# Altium PCB top pcd.PcbDoc
Units mil, origin at the board's own origin, x right, y up, seen from the top; angles counter-clockwise.
Board outline 3015 x 3545 mil, 2 copper layers (Top Layer, Bottom Layer); 18 components, 70 nets, 74 pads, 0 vias.
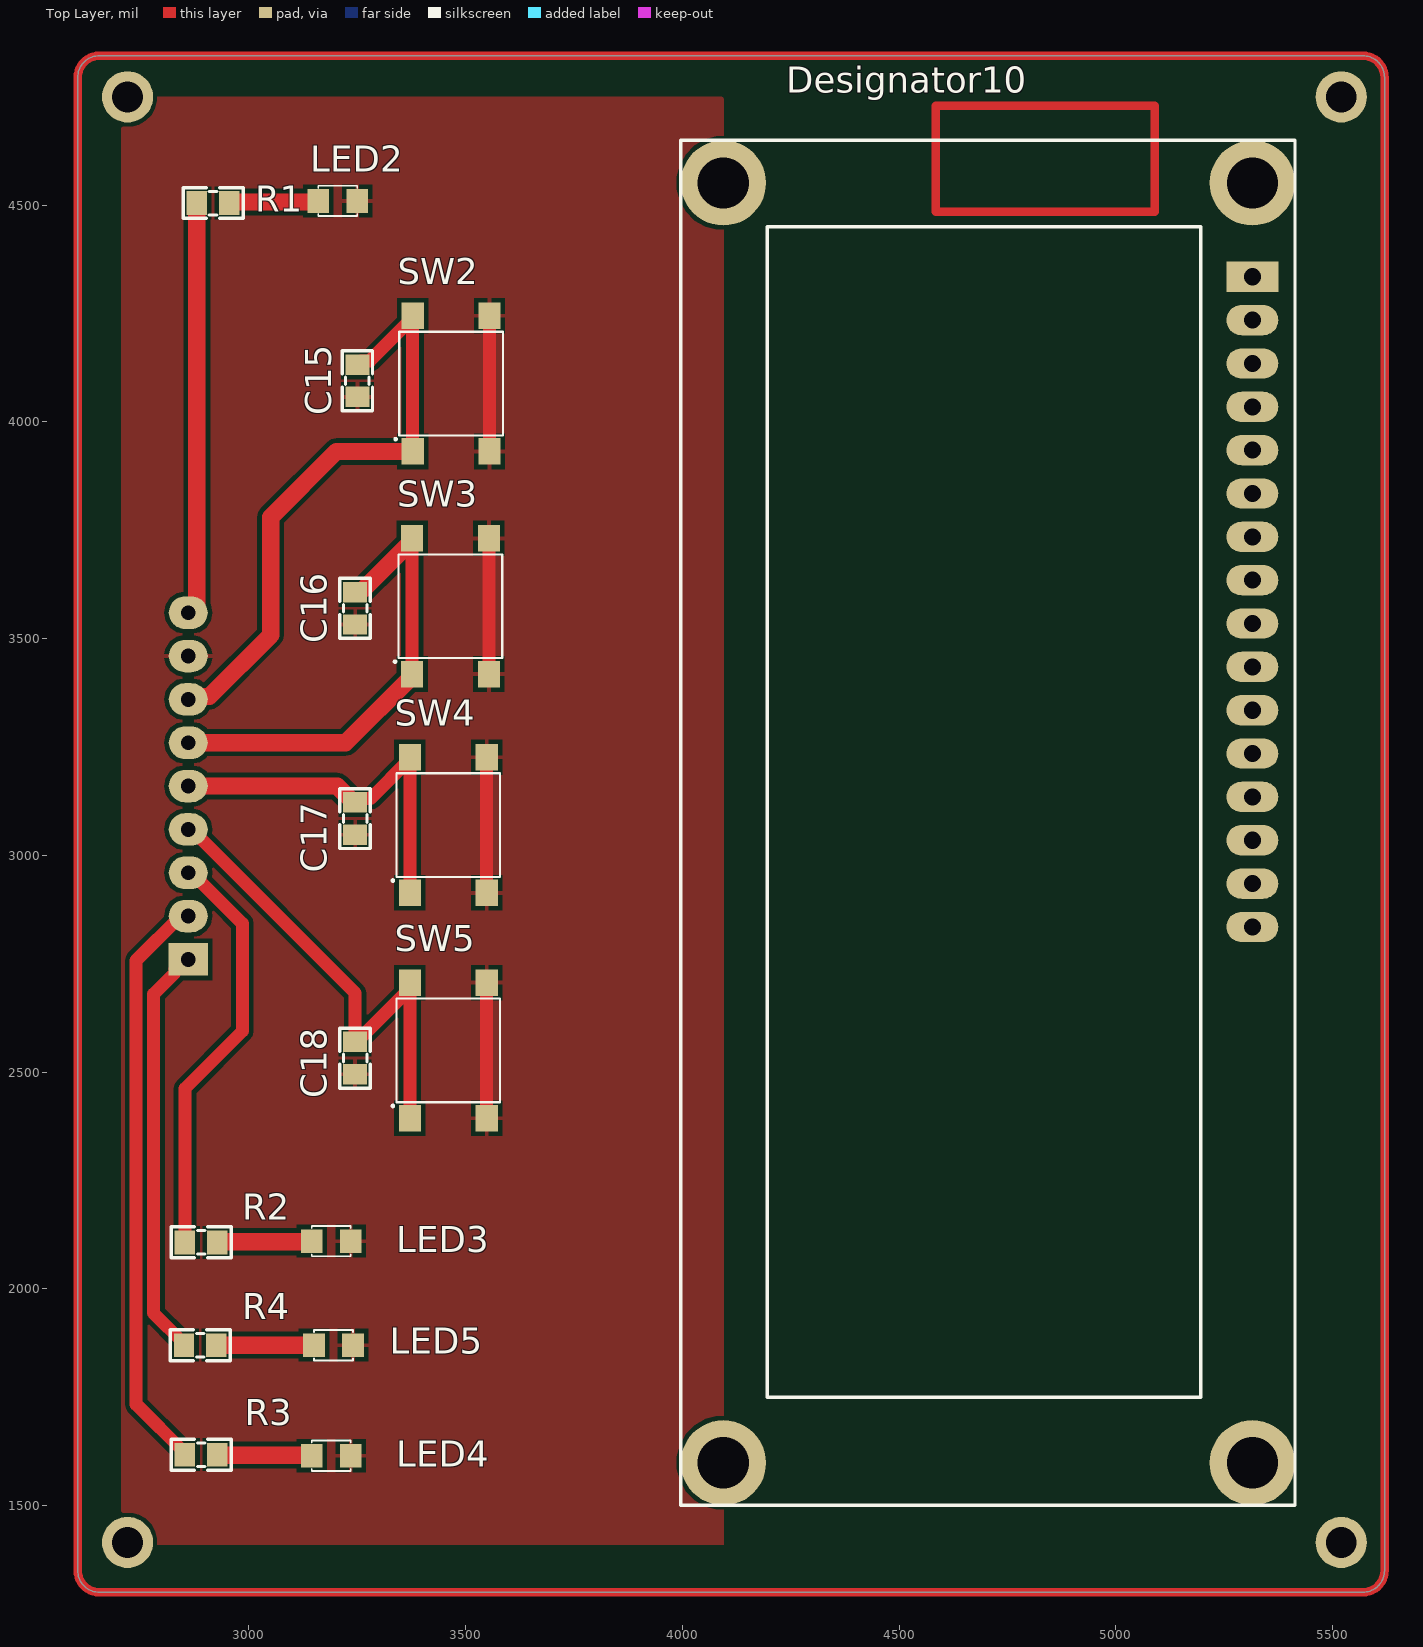
[diagram p0: Top Layer view]
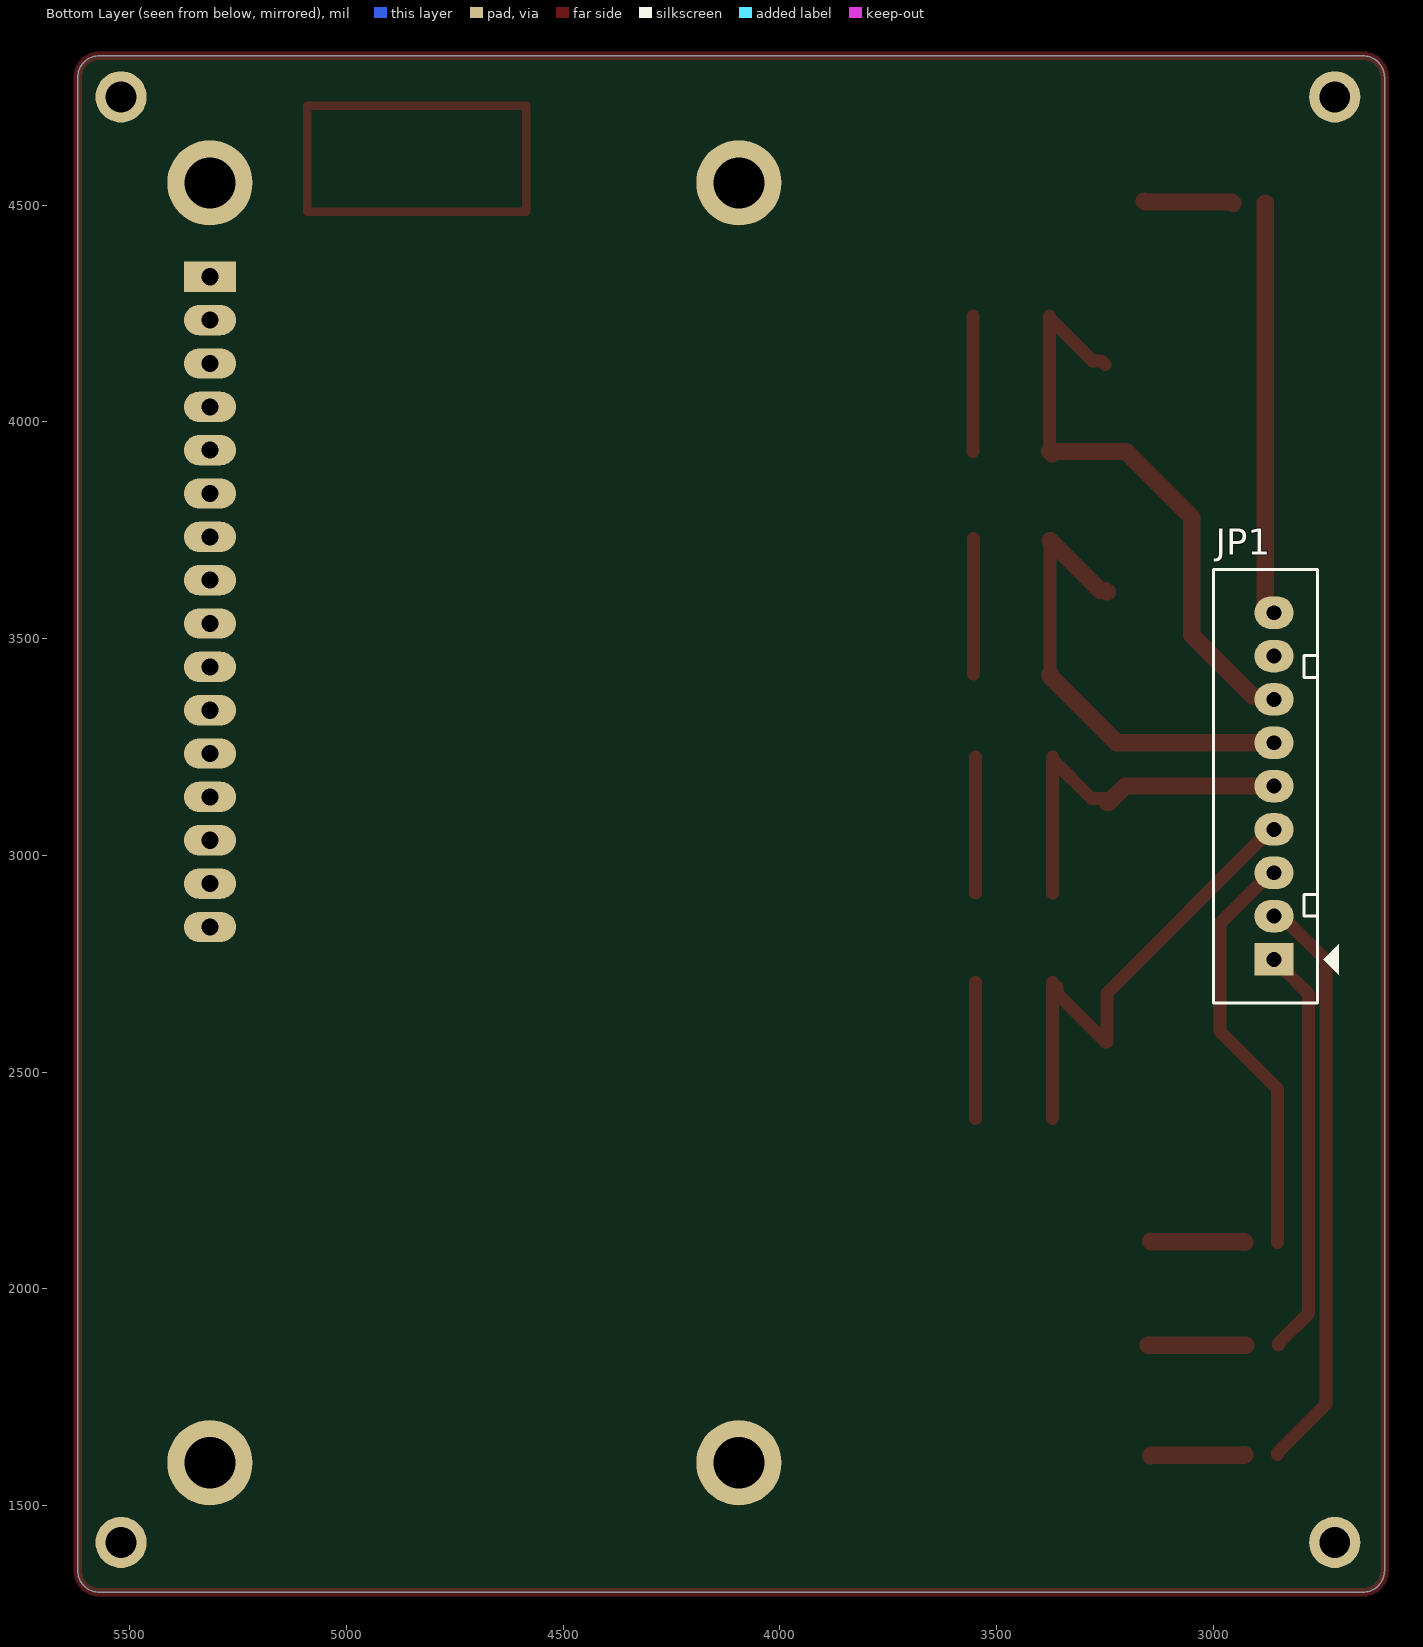
[diagram p1: Bottom Layer view, seen from below]
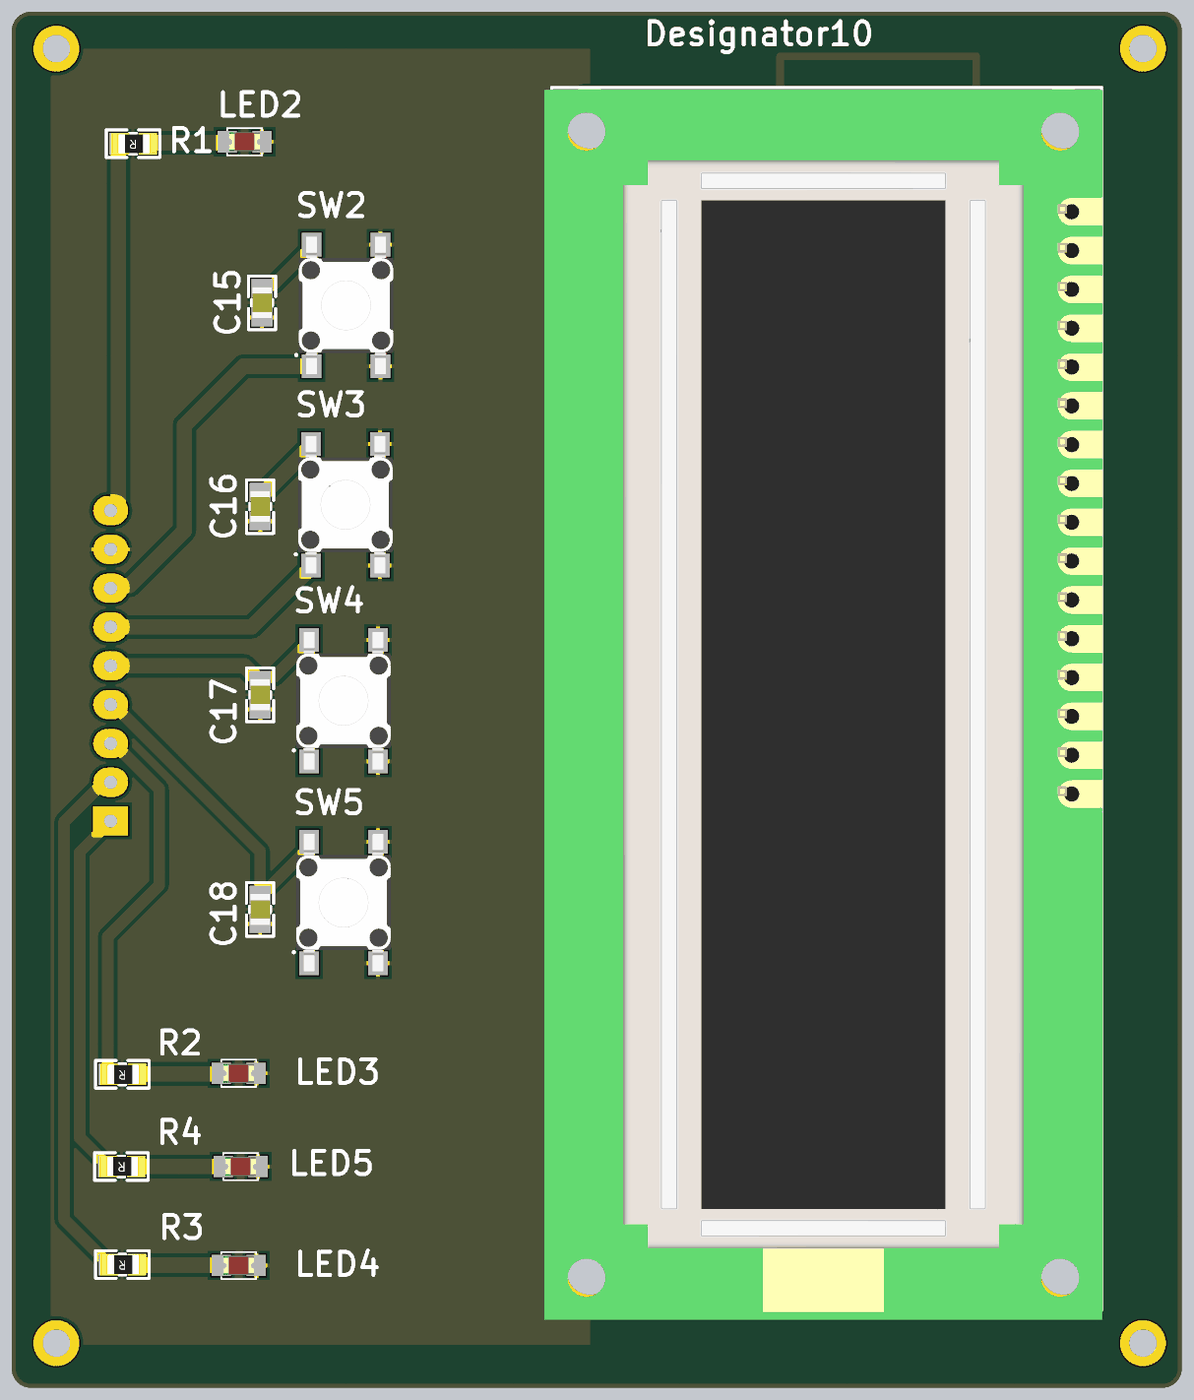
[diagram p2: 3D render of the assembled board from above, using the file's embedded part models]

## Layer stack, top to bottom
Top Solder: solder mask 0.4, Solder Resist, Dk 3.5
Top Layer: signal copper 1.4
Dielectric 1: dielectric 12.6, FR-4, Dk 4.8
Bottom Layer: signal copper 1.4
Bottom Solder: solder mask 0.4, Solder Resist, Dk 3.5

## Board outline
2605,1350 ccw(c2655,1350) 2655,1300 5570,1300 ccw(c5570,1350) 5620,1350 5620,4795 ccw(c5570,4795) 5570,4845 2655,4845 ccw(c2655,4795) 2605,4795

## Design rules (kind name [scope] priority, off if disabled: settings)
Clearance [All] p1: gap=10 ignorepadtopadclearanceinfootprint=FALSE except(0: Arc-Hole Track-Hole SMDPad-Hole THPad-Hole Via-Hole Fill-Hole Poly-Hole Region-Hole Text-Hole)
PolygonConnect [All] p1: connectstyle=Relief reliefconductorwidth=10 reliefentries=4 polygonreliefangle="90 Angle" airgapwidth=10
RoutingVias [All] p1: holewidth=28 width=50 viastyle="Through Hole" minholewidth=28 minwidth=50 maxholewidth=28 maxwidth=50
SolderMaskExpansion [All] p1: expansion=4 istentingtop=FALSE
Width [All] p1: maxlimit=10 minlimit=10 preferedwidth=10
30 further rules are at their usual default settings.

## Classes and differential pairs
component class Tien: C15 C16 C17 C18 JP1 LED2 LED3 LED4 LED5 R1 R2 R3 R4 SW2 SW3 SW4 SW5

## Components (designator, comment, footprint, x,y, rotation, side; value= is the part's Value field where it differs from the comment)
C15 "106" "Tu 0805" 3250,4095 r90 top
C16 "106" "Tu 0805" 3245,3570 r90 top
C17 "106" "Tu 0805" 3245,3085 r90 top
C18 "106" "Tu 0805" 3244.87,2532.23 r90 top
Designator10 "Comment" LCD16X2 5315,4335 r270 top
JP1 "JP9" Header9 2860,2760 r90 bottom value="Connector 9"
LED2 "LED" LED-0805-Red 3160,4510 r0 top value="LED 3 - 5 ly 2 Colour"
LED3 "LED" LED-0805-Red 3145,2110 r0 top value="LED 3 - 5 ly 2 Colour"
LED4 "LED" LED-0805-Red 3145,1615 r0 top value="LED 3 - 5 ly 2 Colour"
LED5 "LED" LED-0805-Red 3150,1870 r0 top value="LED 3 - 5 ly 2 Colour"
R1 "330R" "Tro SMD 0805" 2917.57,4502.61 r180 top
R2 "330R" "Tro SMD 0805" 2890,2105 r180 top
R3 "330R" "Tro SMD 0805" 2890,1615 r180 top
R4 "330R" "Tro SMD 0805" 2887.77,1867.61 r180 top
SW2 "SW" SW2-SMD 3466.42,4088.5 r90 top value="Button chip 4 pin"
SW3 "SW" SW2-SMD 3465,3575 r90 top value="Button chip 4 pin"
SW4 "SW" SW2-SMD 3460,3070 r90 top value="Button chip 4 pin"
SW5 "SW" SW2-SMD 3460,2550 r90 top value="Button chip 4 pin"

## Footprints (in the part's own frame and the unit in brackets; to place one, negate y for a bottom-side part, rotate by r counter-clockwise, add the part's x,y. Pads: shape width x height; smd on the part's side, far side on the other; paste and mask are expansions set on the pad)
Header9 [mil] "CON9"
  rect 75x90 hole 34: 1(0,0)
  oval 75x90 hole 34: 2(100,0) 3(200,0) 4(300,0) 5(400,0) 6(500,0) 7(600,0) 8(700,0) 9(800,0)
  silkscreen extent -100,-150 900,140
LCD16X2 [mm] "LCD dipslay 16x2, 16 pin"
  round 5 hole 3: 1(-5.5,0) 1(-5.5,-31) 1(69.5,-31) 1(69.5,0)
  rect 1.778x3.048 hole 1: 1(0,0)
  oval 1.778x3.048 hole 1: 2(2.54,0) 3(5.08,0) 4(7.62,0) 5(10.16,0) 6(12.7,0) 7(15.24,0) 8(17.78,0) 9(20.32,0) 10(22.86,0) 11(25.4,0) 12(27.94,0) 13(30.48,0) 14(33.02,0) 15(35.56,0) 16(38.1,0)
  round 0 all layers, no hole: ""(-5.5,0)
  silkscreen extent -8,-33.5 72,2.5, body extent -7.87,-33.96 72.64,2.54, height 18.14
LED-0805-Red [mil]
  rect 50x55 smd: 1(0,0) 2(90,0)
  silkscreen extent 0,-35 90,35, body extent 5,-25 85,25, height 43
SW2-SMD [mm] "6*6mm vertical type, SMD, height 5.0mm, black actuator, 160gf, T&R"
  rect 1.55x1.3 smd: 1(-3.975,2.25) 2(-3.975,-2.25) 3(3.975,-2.25) 4(3.975,2.25)
  silkscreen extent -3.29,-3.04 3.04,3.29, body extent -4.5,-3.1 4.5,3.1, height 4.99
"Tro SMD 0805" [mm]
  rect 1.2x1.4 smd: 1(-0.946,-0.061) 2(0.954,-0.061)
  silkscreen extent -1.75,-0.97 1.75,0.84, body extent -1.56,-0.76 1.44,0.64, height 0.53
"Tu 0805" [mm] "Compoment SMD 80x50mil"
  rect 1.2x1.4 smd: 1(-0.946,-0.003) 2(0.954,-0.003)
  silkscreen extent -1.75,-0.89 1.75,0.89, body extent -1.01,-0.64 1.01,0.63, height 0.61

## Part data
C15 C16 C17 C18: library part "Tu 0805 106 16V 10%", "Dán", Chung_Loai=Dán, Don_Vi=Con, Ma_Hang=MH004553, So_Chan=2, Ten_Linh_Kien="Tụ 0805 106-10uF 10% 16V"
JP1: library part Header9, "Connector 9"
LED2 LED3 LED4 LED5: library part "LED SMD"
R1 R2 R3 R4: library part "Tro 0805 5% 330R", "Dán", Chung_Loai=Dán, Don_Vi=Con, Ma_Hang=MH005337, So_Chan=2, Ten_Linh_Kien="Trở 0805 5% 330R"
SW2 SW3 SW4 SW5: library part SW4, "Switch button 4 pin"

## Free pads (board coordinates)
  round 118.11 hole 70.87: 14(2720,1415) 14(2720,4750) 14(5520,1415) 14(5520,4750)

## Nets (pads, with @x,y where several pads share a name; then routed paths per layer and width w, separated by ;. In a path a pad name is that pad's centre, name@x,y a point inside that pad or via, vN(x,y) a via of type N, cw(c..) or ccw(c..) an arc to the next point about the centre after c; other vN are vias at no path point)
NetBT1_1: 
NetBT1_2: 
NetC1_1: 
NetC1_2: 
NetC1_3: 
NetC1_4: 
NetC1_5: 
NetC1_6: 
NetC1_7: 
NetC1_8: 
NetC1_9: 
NetC1_10: 
NetC1_11: 
NetC1_12: 
NetC1_13: 
NetC1_14: 
NetC2_1: 
NetC2_2: 
NetC2_3: 
NetC2_4: 
NetC2_5: 
NetC2_6: 
NetC2_8: 
NetC2_9: 
NetC2_10: 
NetC2_11: 
NetC2_12: 
NetC2_13: 
NetC2_14: 
NetC3_1: 
NetC3_2: 
NetC3_3: 
NetC3_4: 
NetC3_5: 
NetC3_6: 
NetC3_8: 
NetC3_9: 
NetC3_10: 
NetC3_11: 
NetC3_12: 
NetC3_13: 
NetC3_14: 
Netc8_1: 
NetC9_1: 
NetC9_2: 
NetC9_3: 
NetC9_4: 
NetC9_5: 
NetC9_6: 
NetC9_8: 
NetC9_10: 
NetC9_11: 
NetC9_12: 
NetC9_13: 
NetC9_14: 
NetC15_1: C15.1 C16.1 C17.1 C18.1 JP1.8 LED2.2 LED3.2 LED4.2 LED5.2 SW2.2 SW2.3 SW3.2 SW3.3 SW4.2 SW4.3 SW5.2 SW5.3 | length 1252
  Top Layer w30: SW5.2 SW5.3 ; SW4.2 SW4.3 ; SW3.2 SW3.3 ; SW2.2 SW2.3
NetC15_2: C15.2 JP1.7 SW2.1 SW2.4 | length 1407
  Top Layer w30: C15.2 3258.76,4141.2 3278.95,4141.2 SW2.4@3377.83,4240.08 ; SW2.1 SW2.4@3377.83,4240.08 ; SW2.4 SW2.4@3377.83,4240.08
  Top Layer w40: JP1.7 2866.7,3366.7 2908.27,3366.7 3050,3508.43 3050,3780 3202.01,3932.01 3372.24,3932.01 3372.24,3926.42 SW2.1
NetC16_2: C16.2 JP1.6 SW3.1 SW3.4 | length 1078.5
  Top Layer w30: SW3.1 3376.42,3726.57 SW3.4
  Top Layer w40: JP1.6 3222.83,3260 3376.42,3413.58 SW3.1 ; C16.2 3248.76,3611.2 3261.04,3611.2 SW3.4@3376.42,3726.57
NetC17_2: C17.2 JP1.5 SW4.1 SW4.4 | length 880.9
  Top Layer w30: C17.2 3253.76,3131.2 3281.04,3131.2 SW4.4@3371.42,3221.57 ; SW4.1 SW4.4@3371.42,3221.57 ; SW4.4 SW4.4@3371.42,3221.57
  Top Layer w40: JP1.5 3203.77,3160 3241.2,3122.57 C17.2
NetC18_2: C18.2 JP1.4 SW5.1 SW5.4 | length 1158.4
  Top Layer w30: JP1.4 2867.5,3060 3245,2682.5 C18.2 3248.94,2569.8 3360.83,2681.69 3360.83,2695.91 SW5.4 SW5.1
NetJ2_1: 
NetJ2_2: 
NetJP1_1: JP1.1 R4.2 | length 956.6
  Top Layer w30: R4.2 2850.2,1873.94 2780,1944.13 2780,2680 2830,2730 2830,2737.5 2852.5,2760 JP1.1
NetJP1_2: JP1.2 R3.2 | length 1349.3
  Top Layer w30: R3.2 2852.43,1621.33 2740,1733.76 2740,2757.86 2842.14,2860 JP1.2
NetJP1_3: JP1.3 R2.2 | length 963.7
  Top Layer w30: R2.2 2852.43,2462.43 2985,2595 2985,2842.5 2867.5,2960 JP1.3
NetJP1_9: JP1.9 R1.2 | length 953.3
  Top Layer w40: JP1.9 2860,3561.97 2880,3581.97 R1.2
NetLED2_1: LED2.1 R1.1 | length 207.3
  Top Layer w40: R1.1 2957.3,4507.5 3157.5,4507.5 LED2.1
NetLED3_1: LED3.1 R2.1 | length 218.9
  Top Layer w40: R2.1 2928.53,2108.7 3143.7,2108.7 LED3.1
NetLED4_1: LED4.1 R3.1 | length 218.8
  Top Layer w40: R3.1 2928.43,1616.2 3143.8,1616.2 LED4.1
NetLED5_1: LED5.1 R4.1 | length 225
  Top Layer w40: R4.1 LED5.1
pads on no net: Designator10. Designator10.1 Designator10.2 Designator10.3 Designator10.4 Designator10.5 Designator10.6 Designator10.7 Designator10.8 Designator10.9 Designator10.10 Designator10.11 Designator10.12 Designator10.13 Designator10.14 Designator10.15 Designator10.16
copper on no net: | length 14534.2
  Top Layer w19.68: 2605,1350 ccw(c2655,1350) 2655,1300 2710,1300 5520,1300 5570,1300 ccw(c5570,1350) 5620,1350 5620,4795 ccw(c5570,4795) 5570,4845 2720,4845 2655,4845 ccw(c2655,4795) 2605,4795 2605,1350 ; 4585,4485 5090,4485 5090,4730 4585,4730 4585,4485

## Polygon pours and split planes (outlines as drawn)
NetC15_1 on Top Layer "gnd2" (solid, remove dead copper, pour order 0): 2720,1415 ccw(c2725,1415) 2725,1410 4095,1410 4095,4745 ccw(c4090,4745) 4090,4750 2705,4750 2705,1410 2715,1410 ccw(c2715,1415)